# EAGLE board lt3477-buck-boost-flashlight-driver-17mm-mk-1.0 (EAGLE 6.6.0)
VERSION: v1.0
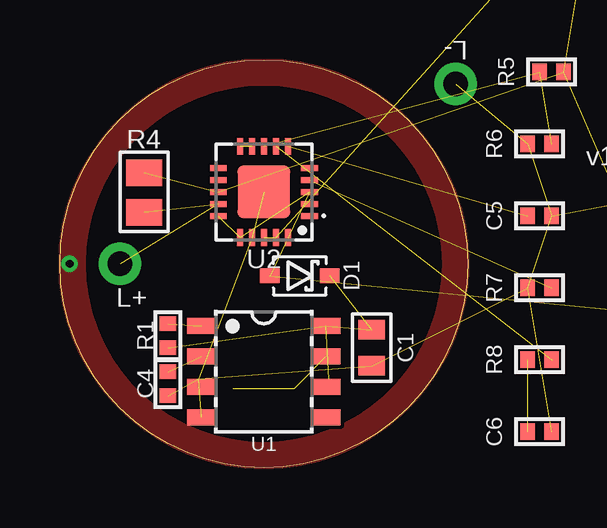
[diagram p0: board, top side]
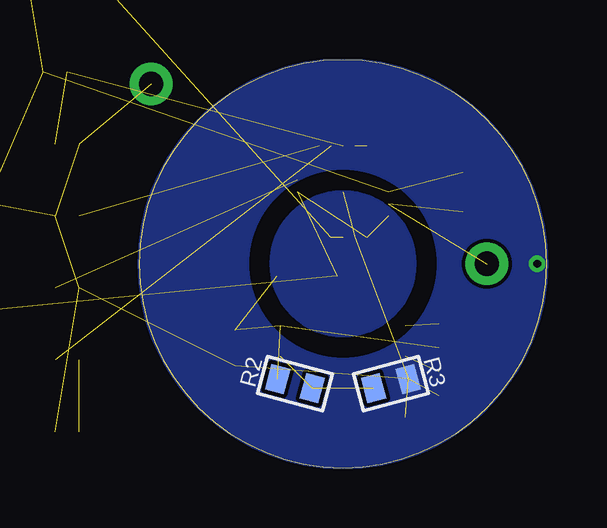
[diagram p1: board, bottom side, seen from below]

Size 17 x 17 mm. Coordinates in mm from the lower left corner, seen from the top.
Outline: 0,8.5 arc-180 17,8.5 arc-180 0,8.5
Copper layers (1*16): Top 0.0356mm / dielectric 1.5011mm / Bottom 0.0356mm
Design rules "LaenPCBOrder2 *": minimum track width 6mil, minimum drill 13mil, track to track 6mil, track to pad 6mil, pad to pad 6mil, via to via 6mil, smd to smd 6mil, copper to edge 0mil, drill to drill 6mil, minimum pad ring 7mil, minimum via ring 7mil, stop-mask expansion 3mil, vias tented up to drill 20mil, thermal gap 10mil
bRestrict: area 13.3,16.8 to 15.7,19.2; area 15.3,14.8 to 17.7,17.2; area 5,5 to 12,12

## Footprints (pad centres in the part's own frame; a part is rotated, then mirrored left to right if it is on the bottom)
1X01-1MM-CIR-NS = drill 1.016 pad 1.778: 1 0,0
1X01_NOSILK_NOSTOP = drill 0.33: P$1 0,0
C0603-TIGHTER = smd 0.8 x 1.1: 1 -0.75,0; 2 0.75,0
C0402 = smd 0.6 x 0.7: 1 -0.5,0; 2 0.5,0
SOD323-SCHOTTKY = smd 0.8 x 0.6: A -1.25,0; C 1.25,0
XAL40X0 = smd 0.98 x 3.5: P$1 -1.185,0; P$2 1.185,0
R0402 = smd 0.6 x 0.7: 1 -0.5,0; 2 0.5,0
R0603-TIGHTER = smd 0.8 x 1.1: 1 -0.75,0; 2 0.75,0
R0805-TIGHTER = smd 1.1 x 1.5: 1 -0.85,0; 2 0.8,0
SO08-SKINNYPADS = smd 0.65 x 1.2: 1 -1.905,-2.6; 2 -0.635,-2.6; 3 0.635,-2.6; 4 1.905,-2.6; 5 1.905,2.6; 6 0.635,2.6; 7 -0.635,2.6; 8 -1.905,2.6
QFN20-LTC = smd 0.7 x 0.25: 1 -1.9,1; 2 -1.9,0.5; 3 -1.9,0; 4 -1.9,-0.5; 5 -1.9,-1; 11 1.9,-1; 12 1.9,-0.5; 13 1.9,0; 14 1.9,0.5; 15 1.9,1 | smd 0.25 x 0.7: 6 -1,-1.9; 7 -0.5,-1.9; 8 0,-1.9; 9 0.5,-1.9; 10 1,-1.9; 16 1,1.9; 17 0.5,1.9; 18 0,1.9; 19 -0.5,1.9; 20 -1,1.9 | smd 2.2 x 2.2: PAD 0,0

## Placement (x,y rotation side)
+  M01PTH-1MM-CIR-NS  [1X01-1MM-CIR-NS]  24,6.5 180 top  (outside the outline)
-  M01NOT-A-VIA-NOPE  [1X01_NOSILK_NOSTOP]  0.4,8.5 90 bottom
C1  10uF  [C0603-TIGHTER]  13,5 270 top
C2  10uF  [C0603-TIGHTER]  25,11.5 0 top  (outside the outline)
C3  2.2uF  [C0603-TIGHTER]  25,9 0 top  (outside the outline)
C4  1uF  [C0402]  4.5,3.5 270 top
C5  33nF  [C0402]  20,10.5 0 top
C6  4.7nF  [C0402]  20,1.5 0 top
D1  BAT165  [SOD323-SCHOTTKY]  10,8 0 top
D2  BAT60A  [SOD323-SCHOTTKY]  20.5,21 0 top  (outside the outline)
FRAME1  FRAME-LETTERNO_PACKAGE  [DUMMY]  0,0 0 top
L1  10uH  [XAL40X0]  30,17 0 top  (outside the outline)
L+  M01PTH-1MM-CIR-NS  [1X01-1MM-CIR-NS]  2.5,8.5 90 top
L-  M01PTH-1MM-CIR-NS  [1X01-1MM-CIR-NS]  16.5,16 0 top
R1  10K  [R0402]  4.5,5.5 270 top
R2  19.1K  [R0603-TIGHTER]  10.5,3.5 165 bottom
R3  4.7K  [R0603-TIGHTER]  6.5,3.5 195 bottom
R4  R068  [R0805-TIGHTER]  3.5,11.5 90 top
R5  200K  [R0402]  20.5,16.5 0 top
R6  10K  [R0402]  20,13.5 0 top
R7  22K  [R0402]  20,7.5 0 top
R8  1K  [R0402]  20,4.5 0 top
U1  Tiny25  [SO08-SKINNYPADS]  8.5,4 270 top
U2  LT3477  [QFN20-LTC]  8.5,11.5 180 top

## Library data of the parts
+ - C1-C6 D1 D2 L1 L+ L- R1-R8 U1 U2 = a_parts
FRAME1 = a_parts; DESIGNER: sean@yak.net; VERSION: v1.2

## Nets
FBN: R5.1 R6.2 U2.8
GND: -.P$1 C1.2 C2.2 C3.2 C4.2 C5.2 C6.2 L-.1 R3.1 R6.1 R7.1 U1.4 U2.17 U2.PAD
ISP2: C3.1 D2.C R4.2 R5.2 U2.13
LED+: L+.1 R4.1 U2.14
N$1: R7.2 U2.4
N$2: R1.1 U1.1
N$3: R2.1 R3.2 U1.7
N$4: C5.1 U2.6
N$5: C4.1 U1.2
N$6: C6.1 R8.1
N$7: R8.2 U2.7
N$9: U2.9 U2.10
PWM: U1.6
SW: D2.A L1.P$2 U2.18 U2.19
VBAT: +.1 C2.1 D1.A L1.P$1 U2.3 U2.15 U2.16
VCC: C1.1 D1.C R1.2 R2.2 U1.8

## Tracks (layer width: path | path; a pad name or v marks a point on that pad's centre or on a via)
FBN  (2 unrouted)
GND  (12 unrouted)
  pour Top (isolate 0.152, rank 6, no thermals): 0,8.5 arc90 8.5,0 arc90 17,8.5 16,8.5 arc-90 8.5,1 arc-90 1,8.5
  pour Bottom (isolate 0.152, rank 6, no thermals): 8.5,0 arc-90 0,8.5 arc-90 8.5,17 arc-90 17,8.5 arc-90
  pour Top (isolate 0.152, rank 6, no thermals): 17,8.5 arc90 8.5,17 arc90 0,8.5 1,8.5 arc-90 8.5,16 arc-90 16,8.5
ISP2  (4 unrouted)
LED+  (2 unrouted)
N$1  (1 unrouted)
N$2  (1 unrouted)
N$3  (2 unrouted)
N$4  (1 unrouted)
N$5  (1 unrouted)
N$6  (1 unrouted)
N$7  (1 unrouted)
N$9  (1 unrouted)
SW  (3 unrouted)
VBAT  (6 unrouted)
  pour Bottom (isolate 0.152, no thermals): 5.5,8.5 arc-180 11.5,8.5 arc-180
VCC  (4 unrouted)

## Text on the board
bPlace: LT3477 / Buck-Boost / Flashlight Driver